# Altium PCB Final_MCU.PcbDoc (part 1 of 2)
Units mil, origin at the board's own origin, x right, y up, seen from the top; angles counter-clockwise.
Board outline 6000 x 4000 mil, 2 copper layers (Top Layer, Bottom Layer); 47 components, 30 nets, 197 pads, 0 vias.
Unrouted connection lines stored in the file: 115.
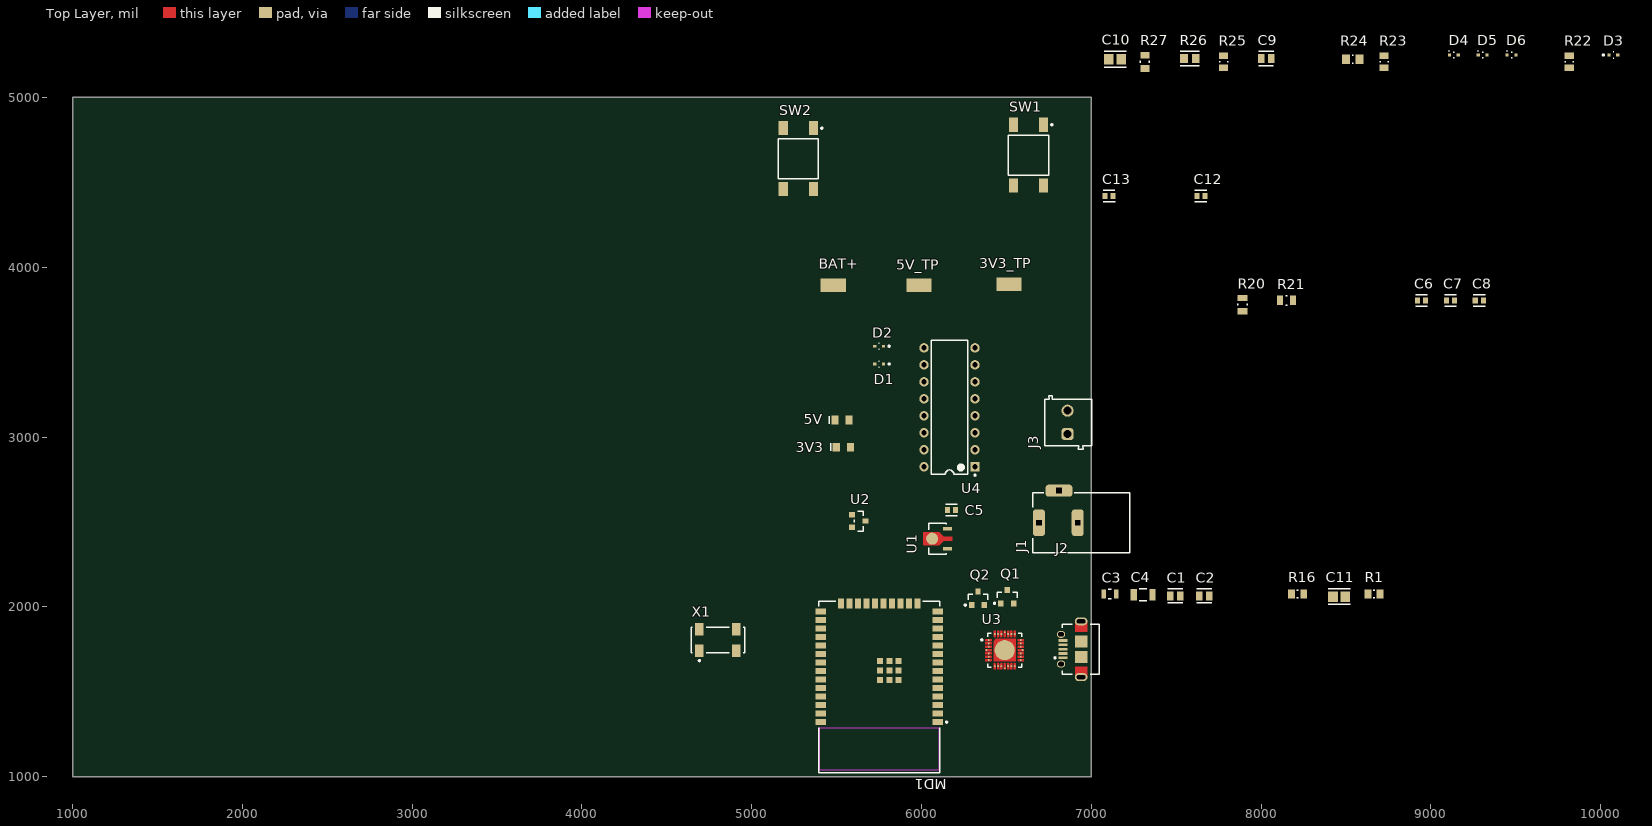
[diagram p0: Top Layer view]
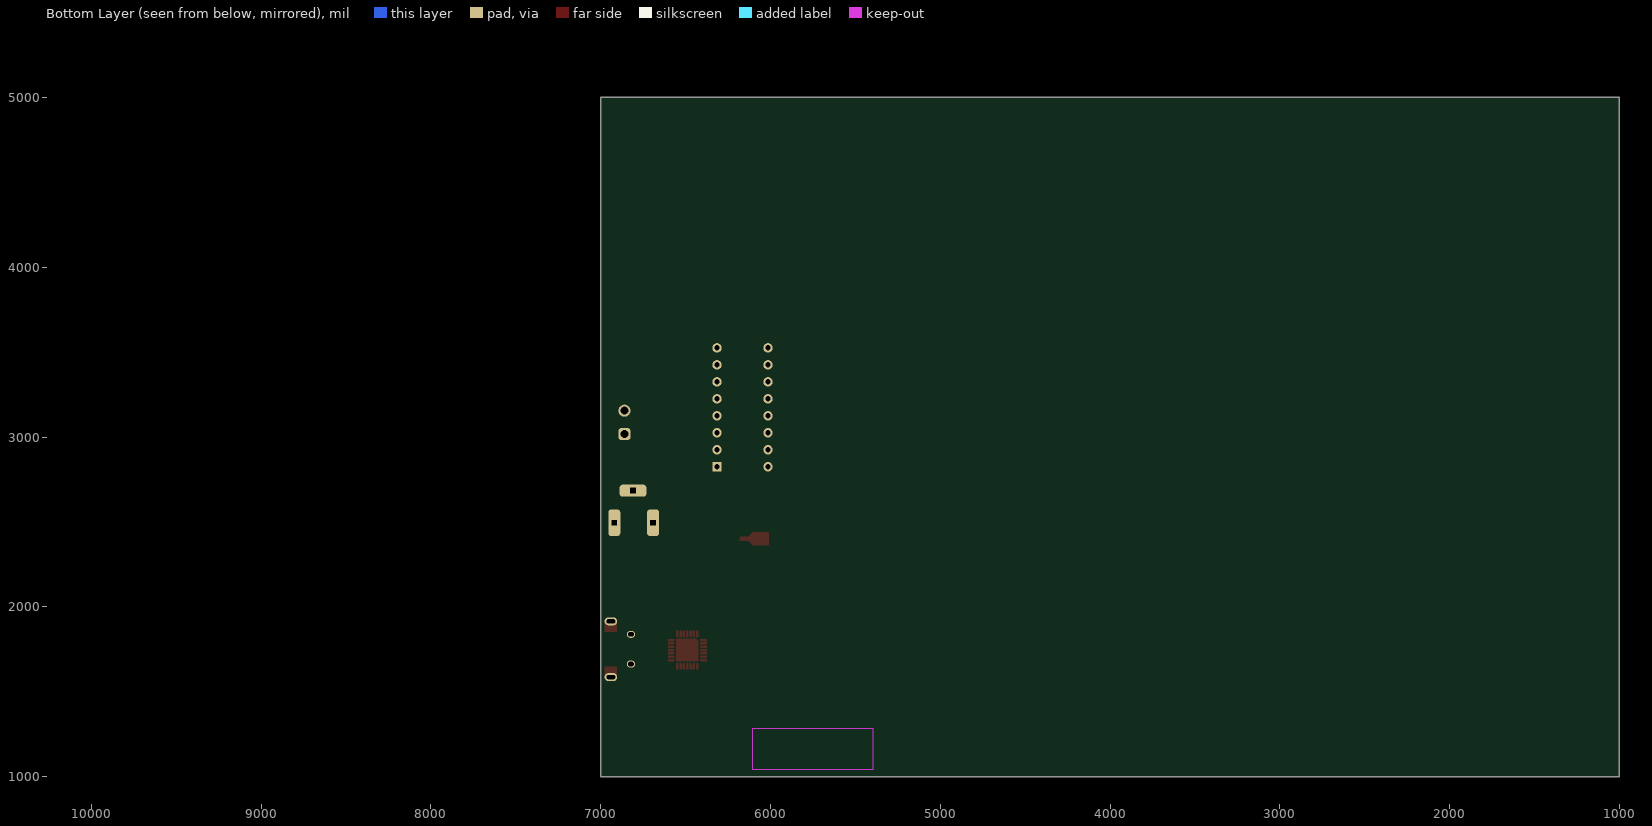
[diagram p1: Bottom Layer view, seen from below]

## Layer stack, top to bottom
Top Solder: solder mask 0.4, Solder Resist, Dk 3.5
Top Layer: signal copper 1.4
Dielectric 1: dielectric 12.6, FR-4, Dk 4.8
Bottom Layer: signal copper 1.4
Bottom Solder: solder mask 0.4, Solder Resist, Dk 3.5

## Board outline
1000,1000 7000,1000 7000,5000 1000,5000

## Design rules (kind name [scope] priority, off if disabled: settings)
Clearance [All] p1: gap=10 ignorepadtopadclearanceinfootprint=FALSE
PolygonConnect [All] p1: connectstyle=Relief reliefconductorwidth=10 reliefentries=4 polygonreliefangle="90 Angle" airgapwidth=10
RoutingVias [All] p1: holewidth=28 width=50 viastyle="Through Hole" minholewidth=28 minwidth=50 maxholewidth=28 maxwidth=50
SolderMaskExpansion [All] p1: expansion=4 istentingtop=FALSE
Width [All] p1: maxlimit=10 minlimit=10 preferedwidth=10
30 further rules are at their usual default settings.

## Classes and differential pairs
component class USB: C9 C10 D3 D4 D5 D6 J2 Q1 Q2 R22 R23 R24 R25 R26 R27 U3
component class Programming: C12 C13 SW1 SW2
component class Power: 3V3 3V3_TP 5V 5V_TP BAT+ C5 C6 C7 C8 D1 D2 J1 R20 R21 U1 U2
component class Motor: J3 U4
component class MCU: C1 C2 C3 C4 C11 MD1 R1 R16 X1

## Components (designator, comment, footprint, x,y, rotation, side; value= is the part's Value field where it differs from the comment)
3V3 "150080GS75000" WL-SMCW_0805_150080xx75000 5540,2940 r0 top
3V3_TP "" KSTN-5019_V 6515,3900 r180 top
5V "150080GS75000" WL-SMCW_0805_150080xx75000 5531.34,3100 r0 top
5V_TP "" KSTN-5019_V 5985,3895 r180 top
BAT+ "" KSTN-5019_V 5480,3895 r180 top
C1 "C0805C120J5GACTU" FP-C0805C-DN-MFG 7495,2065 r0 top value="12 pF"
C2 "C0805C120J5GACTU" FP-C0805C-DN-MFG 7665,2065 r0 top value="12 pF"
C3 "GRM21BR60J226ME39L" FP-GRM21B-0_15-MFG 7110,2075 r0 top value=22uF
C4 "C1206C104K1RACTU" FP-C1206C-EB-MFG 7305,2070 r0 top value="0.10 μF"
C5 "C0603C104K5RACTU" FP-C0603C-CF-MFG 6176.38,2570 r0 top value="0.10 μF"
C6 "C0603C104K5RACTU" FP-C0603C-CF-MFG 8945,3805 r0 top value="0.10 μF"
C7 "C0603C104K5RACTU" FP-C0603C-CF-MFG 9115,3805 r0 top value="0.10 μF"
C8 "C0603C104K5RACTU" FP-C0603C-CF-MFG 9285,3805 r0 top value="0.10 μF"
C9 "C0805C106K8PACTU" FP-C0805C-DG-MFG 8030,5230 r0 top value=10uF
C10 "CL21B105KOFNNNE" FP-CL21-IPC_A 7140,5225 r0 top value=1uF
C11 "CL21B105KOFNNNE" FP-CL21-IPC_A 8460,2060 r0 top value=1uF
C12 "C0603C104K5RACTU" FP-C0603C-CF-MFG 7645,4420 r0 top value="0.10 μF"
C13 "C0603C104K5RACTU" FP-C0603C-CF-MFG 7105,4420 r0 top value="0.10 μF"
D1 "RB520S30T1G" FP-502-01-MFG 5750,3430 r180 top
D2 "RB520S30T1G" FP-502-01-MFG 5750,3535 r180 top
D3 "RB520S30T1G" FP-502-01-MFG 10075,5250 r0 top
D4 "ESD5Z5.0T1G" ONSC-SOD-523-2-502-01_V 9135,5250 r0 top
D5 "ESD5Z5.0T1G" ONSC-SOD-523-2-502-01_V 9305,5250 r0 top
D6 "ESD5Z5.0T1G" ONSC-SOD-523-2-502-01_V 9475,5250 r0 top
J1 "694106301002" 694106301002 6941.65,2495 r90 top
J2 "47589-0001" MOLX-47589-0001_V 6880.94,1750.28 r90 top
J3 "691103110002" 691103110002 -43136.06,53086.1 r90 top
MD1 "ESP32-WROOM-32E (4MB)" FP-ESP32-WROOM-32E_4MB-MFG 5751.06,1528.03 r180 top
Q1 "BC818-40LT1G" ONSC-SOT-23-3-318-08_V 6505,2060 r90 top
Q2 "BC818-40LT1G" ONSC-SOT-23-3-318-08_V 6332.4,2049.37 r90 top
R1 "RC0805FR-0710KL" RESC2013X60X35NL10T20 8665,2075 r0 top value=10kR
R16 "RC0805FR-0710KL" RESC2013X60X35NL10T20 8215,2075 r0 top value=10kR
R20 "CRCW0805330RFKEA" FP-CRCW0805-e3-MFG 7890,3780 r90 top value=330R
R21 "CRCW0805330RFKEA" FP-CRCW0805-e3-MFG 8150,3805 r0 top value=330R
R22 "RC0805FR-0710KL" RESC2013X60X35NL10T20 9815,5210 r90 top value=10kR
R23 "RC0805FR-0710KL" RESC2013X60X35NL10T20 8725,5210 r90 top value=10kR
R24 "RC0805FR-071KL" RESC2013X60X35ML10T20 8540,5225 r0 top value=1kR
R25 "RC0805FR-0710KL" RESC2013X60X35NL10T20 7780,5210 r90 top value=10kR
R26 "RMCF0805FT22K1" FP-RMCF0805-IPC_B 7580,5230 r0 top value=22.1kR
R27 "RN73C2A47K5BTD" FP-RN732A-MFG 7315,5210 r90 top value=47.5KΩ
SW1 "FSM4JSMATR" TECO-FSM4JSMATR_V 6630,4660 r0 top
SW2 "FSM4JSMATR" TECO-FSM4JSMATR_V 5275,4640 r0 top
U1 "L78L05ACUTR" FP-SOT-89-7098166-MFG 6095,2405 r90 top
U2 "AP2120N-3.3TRG1" FP-SOT23-MFG 5630,2505 r0 top
U3 "CP2102N-A02-GQFN28R" FP-CP2102N-A02-GQFN28R-MFG 6490,1745 r0 top
U4 "L293D" STM-L293D-16 6165,3175 r180 top
X1 "ABS25-32.768KHZ-6-T" ABRA-ABS25-4_V 4800,1805 r0 top

## Footprints (in the part's own frame and the unit in brackets; to place one, negate y for a bottom-side part, rotate by r counter-clockwise, add the part's x,y. Pads: shape width x height; smd on the part's side, far side on the other; paste and mask are expansions set on the pad)
691103110002 [mm] "3,50mm - modular - blue - Horizontal wire entry - Pressure clamp - 8,4mm height - 02p"
  rrect50% 1.8x1.8 hole 1.2: 1(-1271.75,-1269.9)
  round 1.8 hole 1.2: 2(-1268.25,-1269.9)
  silkscreen extent -1274,-1273.5 -1266,-1266.5, body extent -1274,-1273.5 -1266,-1266.5, height 8.45
694106301002 [mm] "DC Power Jack Right Angled(6.4)"
  rrect50% 4x1.8 hole 0.8 square: 1(0,6.35) 2(0,0.55)
  rrect50% 1.8x4 hole 0.8 square: 3(4.8,3.35)
  silkscreen extent -4.5,-7.25 4.5,7.25, body extent -4.5,-7.25 5,7.25, height 10.75
ABRA-ABS25-4_V [mm] "SMD, 4-Leads, Body 8x3.8mm, Pitch 5.5mm, Height 2.5mm"
  rect 1.3x1.9 smd: 1(-2.75,-1.6) 2(2.75,-1.6) 3(2.75,1.6) 4(-2.75,1.6)
  silkscreen extent -4,-3.22 4,1.9, body extent -4,-2 4,2, height 2.66
FP-502-01-MFG [mm]
  rect 0.48x0.4 smd paste+0 mask+0: 1(-0.66,0) 2(0.66,0)
  silkscreen extent -1.63,-0.45 0.05,0.45, body extent -1,-0.55 1,0.55, height 0.25
FP-C0603C-CF-MFG [mm]
  rect 0.75x0.9 smd paste+0 mask+0: 1(-0.6,0) 2(0.6,0)
  silkscreen extent -0.87,-0.85 0.88,0.85, body extent -1.2,-0.6 1.2,0.6, height 0.25
FP-C0805C-DG-MFG [mm]
  rect 0.95x1.35 smd paste+0 mask+0: 1(-0.75,0) 2(0.75,0)
  silkscreen extent -1.11,-1.08 1.1,1.07, body extent -1.4,-0.85 1.4,0.85, height 0.25
FP-C0805C-DN-MFG [mm]
  rect 0.95x1.35 smd paste+0 mask+0: 1(-0.75,0) 2(0.75,0)
  silkscreen extent -1.1,-1.07 1.1,1.07, body extent -1.4,-0.85 1.4,0.85, height 0.25
FP-C1206C-EB-MFG [mm]
  rect 0.95x1.7 smd paste+0 mask+0: 1(-1.4,0) 2(1.4,0)
  silkscreen extent -0.55,-0.9 0.55,0.9, body extent -2,-1 2,1, height 0.25
FP-CL21-IPC_A [mil]
  rect 57.27x61.27 smd paste+0 mask+0: 1(-36.45,0) 2(36.45,0)
  silkscreen extent -65,-46 65,46, body extent -85,-50 85,50, height 10
FP-CP2102N-A02-GQFN28R-MFG [mm]
  round 0.27 smd paste+0 mask+0: 1(-2.4,1.5) 2(-2.4,1) 3(-2.4,0.5) 4(-2.725,0) 5(-2.4,-0.5) 6(-2.4,-1) 7(-2.4,-1.5) 8(-1.5,-2.4) 9(-1,-2.4) 10(-0.5,-2.4) 11(0,-2.725) 12(0.5,-2.4) 13(1,-2.4) 14(1.5,-2.4) 15(2.4,-1.5) 16(2.4,-1) 17(2.4,-0.5) 18(2.675,0) 19(2.4,0.5) 20(2.4,1) 21(2.4,1.5) 22(1.5,2.4) 23(1,2.4) 24(0.5,2.4) 25(0,2.675) 26(-0.5,2.4) 27(-1,2.4) 28(-1.5,2.4)
  round 3.015 smd paste-1000 mask+0: 29(0,0)
  Top Layer region: -1.35,2.875 -1.35,2.075 -1.361,2.018 -1.394,1.969 -1.443,1.936 -1.5,1.925 -1.5,1.925 -1.557,1.936 -1.606,1.969 -1.639,2.018 -1.65,2.075 -1.65,2.075 -1.65,2.875
  Top Layer region: -0.85,2.875 -0.85,2.075 -0.861,2.018 -0.894,1.969 -0.943,1.936 -1,1.925 -1,1.925 -1.057,1.936 -1.106,1.969 -1.139,2.018 -1.15,2.075 -1.15,2.075 -1.15,2.875
  Top Layer region: -0.35,2.875 -0.35,2.075 -0.361,2.018 -0.394,1.969 -0.443,1.936 -0.5,1.925 -0.5,1.925 -0.557,1.936 -0.606,1.969 -0.639,2.018 -0.65,2.075 -0.65,2.075 -0.65,2.875
  Top Layer region: 0.15,2.875 0.15,2.075 0.139,2.018 0.106,1.969 0.057,1.936 0,1.925 0,1.925 -0.057,1.936 -0.106,1.969 -0.139,2.018 -0.15,2.075 -0.15,2.075 -0.15,2.875
  Top Layer region: 0.65,2.875 0.65,2.075 0.639,2.018 0.606,1.969 0.557,1.936 0.5,1.925 0.5,1.925 0.443,1.936 0.394,1.969 0.361,2.018 0.35,2.075 0.35,2.075 0.35,2.875
  Top Layer region: 1.15,2.875 1.15,2.075 1.139,2.018 1.106,1.969 1.057,1.936 1,1.925 1,1.925 0.943,1.936 0.894,1.969 0.861,2.018 0.85,2.075 0.85,2.075 0.85,2.875
  Top Layer region: 1.65,2.875 1.65,2.075 1.639,2.018 1.606,1.969 1.557,1.936 1.5,1.925 1.5,1.925 1.443,1.936 1.394,1.969 1.361,2.018 1.35,2.075 1.35,2.075 1.35,2.875
  Top Layer region: 2.875,1.35 2.075,1.35 2.018,1.361 1.969,1.394 1.936,1.443 1.925,1.5 1.925,1.5 1.936,1.557 1.969,1.606 2.018,1.639 2.075,1.65 2.075,1.65 2.875,1.65
  Top Layer region: 2.875,0.85 2.075,0.85 2.018,0.861 1.969,0.894 1.936,0.943 1.925,1 1.925,1 1.936,1.057 1.969,1.106 2.018,1.139 2.075,1.15 2.075,1.15 2.875,1.15
  Top Layer region: 2.875,0.35 2.075,0.35 2.018,0.361 1.969,0.394 1.936,0.443 1.925,0.5 1.925,0.5 1.936,0.557 1.969,0.606 2.018,0.639 2.075,0.65 2.075,0.65 2.875,0.65
  Top Layer region: 2.875,-0.15 2.075,-0.15 2.018,-0.139 1.969,-0.106 1.936,-0.057 1.925,0 1.925,0 1.936,0.057 1.969,0.106 2.018,0.139 2.075,0.15 2.075,0.15 2.875,0.15
  Top Layer region: 2.875,-0.65 2.075,-0.65 2.018,-0.639 1.969,-0.606 1.936,-0.557 1.925,-0.5 1.925,-0.5 1.936,-0.443 1.969,-0.394 2.018,-0.361 2.075,-0.35 2.075,-0.35 2.875,-0.35
  Top Layer region: 2.875,-1.15 2.075,-1.15 2.018,-1.139 1.969,-1.106 1.936,-1.057 1.925,-1 1.925,-1 1.936,-0.943 1.969,-0.894 2.018,-0.861 2.075,-0.85 2.075,-0.85 2.875,-0.85
  Top Layer region: 2.875,-1.65 2.075,-1.65 2.018,-1.639 1.969,-1.606 1.936,-1.557 1.925,-1.5 1.925,-1.5 1.936,-1.443 1.969,-1.394 2.018,-1.361 2.075,-1.35 2.075,-1.35 2.875,-1.35
  Top Layer region: 1.35,-2.875 1.35,-2.075 1.361,-2.018 1.394,-1.969 1.443,-1.936 1.5,-1.925 1.5,-1.925 1.557,-1.936 1.606,-1.969 1.639,-2.018 1.65,-2.075 1.65,-2.075 1.65,-2.875
  Top Layer region: 0.85,-2.875 0.85,-2.075 0.861,-2.018 0.894,-1.969 0.943,-1.936 1,-1.925 1,-1.925 1.057,-1.936 1.106,-1.969 1.139,-2.018 1.15,-2.075 1.15,-2.075 1.15,-2.875
  Top Layer region: 0.35,-2.875 0.35,-2.075 0.361,-2.018 0.394,-1.969 0.443,-1.936 0.5,-1.925 0.5,-1.925 0.557,-1.936 0.606,-1.969 0.639,-2.018 0.65,-2.075 0.65,-2.075 0.65,-2.875
  Top Layer region: -0.15,-2.875 -0.15,-2.075 -0.139,-2.018 -0.106,-1.969 -0.057,-1.936 0,-1.925 0,-1.925 0.057,-1.936 0.106,-1.969 0.139,-2.018 0.15,-2.075 0.15,-2.075 0.15,-2.875
  Top Layer region: -0.65,-2.875 -0.65,-2.075 -0.639,-2.018 -0.606,-1.969 -0.557,-1.936 -0.5,-1.925 -0.5,-1.925 -0.443,-1.936 -0.394,-1.969 -0.361,-2.018 -0.35,-2.075 -0.35,-2.075 -0.35,-2.875
  Top Layer region: -1.15,-2.875 -1.15,-2.075 -1.139,-2.018 -1.106,-1.969 -1.057,-1.936 -1,-1.925 -1,-1.925 -0.943,-1.936 -0.894,-1.969 -0.861,-2.018 -0.85,-2.075 -0.85,-2.075 -0.85,-2.875
  Top Layer region: -1.65,-2.875 -1.65,-2.075 -1.639,-2.018 -1.606,-1.969 -1.557,-1.936 -1.5,-1.925 -1.5,-1.925 -1.443,-1.936 -1.394,-1.969 -1.361,-2.018 -1.35,-2.075 -1.35,-2.075 -1.35,-2.875
  Top Layer region: -2.875,-1.35 -2.075,-1.35 -2.018,-1.361 -1.969,-1.394 -1.936,-1.443 -1.925,-1.5 -1.925,-1.5 -1.936,-1.557 -1.969,-1.606 -2.018,-1.639 -2.075,-1.65 -2.075,-1.65 -2.875,-1.65
  Top Layer region: -2.875,-0.85 -2.075,-0.85 -2.018,-0.861 -1.969,-0.894 -1.936,-0.943 -1.925,-1 -1.925,-1 -1.936,-1.057 -1.969,-1.106 -2.018,-1.139 -2.075,-1.15 -2.075,-1.15 -2.875,-1.15
  Top Layer region: -2.875,-0.35 -2.075,-0.35 -2.018,-0.361 -1.969,-0.394 -1.936,-0.443 -1.925,-0.5 -1.925,-0.5 -1.936,-0.557 -1.969,-0.606 -2.018,-0.639 -2.075,-0.65 -2.075,-0.65 -2.875,-0.65
  Top Layer region: -2.875,0.15 -2.075,0.15 -2.018,0.139 -1.969,0.106 -1.936,0.057 -1.925,0 -1.925,0 -1.936,-0.057 -1.969,-0.106 -2.018,-0.139 -2.075,-0.15 -2.075,-0.15 -2.875,-0.15
  Top Layer region: -2.875,0.65 -2.075,0.65 -2.018,0.639 -1.969,0.606 -1.936,0.557 -1.925,0.5 -1.925,0.5 -1.936,0.443 -1.969,0.394 -2.018,0.361 -2.075,0.35 -2.075,0.35 -2.875,0.35
  Top Layer region: -2.875,1.15 -2.075,1.15 -2.018,1.139 -1.969,1.106 -1.936,1.057 -1.925,1 -1.925,1 -1.936,0.943 -1.969,0.894 -2.018,0.861 -2.075,0.85 -2.075,0.85 -2.875,0.85
  Top Layer region: -2.875,1.65 -2.075,1.65 -2.018,1.639 -1.969,1.606 -1.936,1.557 -1.925,1.5 -1.925,1.5 -1.936,1.443 -1.969,1.394 -2.018,1.361 -2.075,1.35 -2.075,1.35 -2.875,1.35
  Top Layer region: -1.325,1.675 1.675,1.675 1.675,-1.675 -1.675,-1.675 -1.675,1.325 -1.325,1.675
  silkscreen extent -3.55,-2.55 2.55,2.55, body extent -2.98,-2.98 2.98,2.98, height 0.25
FP-CRCW0805-e3-MFG [mm]
  rect 0.95x1.45 smd paste+0 mask+0: 1(-0.975,0) 2(0.975,0)
  silkscreen extent -0.13,-0.7 0.13,0.7, body extent -1.55,-0.82 1.55,0.82, height 0.25
FP-ESP32-WROOM-32E_4MB-MFG [mm]
  rect 1.5x0.9 smd paste+0 mask+0: 1(-8.75,5.26) 2(-8.75,3.99) 3(-8.75,2.72) 4(-8.75,1.45) 5(-8.75,0.18) 6(-8.75,-1.09) 7(-8.75,-2.36) 8(-8.75,-3.63) 9(-8.75,-4.9) 10(-8.75,-6.17) 11(-8.75,-7.44) 12(-8.75,-8.71) 13(-8.75,-9.98) 14(-8.75,-11.25) 25(8.75,-11.25) 26(8.75,-9.98) 27(8.75,-8.71) 28(8.75,-7.44) 29(8.75,-6.17) 30(8.75,-4.9) 31(8.75,-3.63) 32(8.75,-2.36) 33(8.75,-1.09) 34(8.75,0.18) 35(8.75,1.45) 36(8.75,2.72) 37(8.75,3.99) 38(8.75,5.26)
  rect 0.9x1.5 smd paste+0 mask+0: 15(-5.71,-12.5) 16(-4.44,-12.5) 17(-3.17,-12.5) 18(-1.9,-12.5) 19(-0.63,-12.5) 20(0.64,-12.5) 21(1.91,-12.5) 22(3.18,-12.5) 23(4.45,-12.5) 24(5.72,-12.5)
  rect 0.9x0.9 smd paste+0 mask+0: 39(-2.9,-1.06) 39(-2.9,-3.86) 39(-2.9,-2.46) 39(-1.5,-1.06) 39(-1.5,-2.46) 39(-1.5,-3.86) 39(-0.1,-1.06) 39(-0.1,-2.46) 39(-0.1,-3.86)
  Keep-Out Layer region: -9,6.205 9,6.205 9,12.395 -9,12.395
  Keep-Out Layer region: -9,6.205 9,6.205 9,12.395 -9,12.395
  silkscreen extent -10.2,-12.83 9.08,12.83, body extent -9.6,-13.35 9.6,12.93, height 0.25
FP-GRM21B-0_15-MFG [mm]
  rect 0.7x1.3 smd paste+0 mask+0: 1(-0.95,0) 2(0.95,0)
  silkscreen extent -0.23,-0.7 0.23,0.7, body extent -1.4,-0.8 1.4,0.8, height 0.25
FP-RMCF0805-IPC_B [mil]
  rect 45.46x53.63 smd paste+0 mask+0: 1(-34.48,0) 2(34.48,0)
  silkscreen extent -57,-43 57,43, body extent -67,-37 67,37, height 10
FP-RN732A-MFG [mm]
  rect 1x1.35 smd paste+0 mask+0: 1(-1,0) 2(1,0)
  silkscreen extent -0.13,-0.7 0.13,0.7, body extent -1.6,-0.8 1.6,0.8, height 0.25
FP-SOT23-MFG [mm]
  rect 0.9x0.8 smd paste+0 mask+0: 1(-1,0.95) 2(-1,-0.95) 3(1,0)
  silkscreen extent -0.7,-1.5 0.7,1.5, body extent -1.55,-1.6 1.55,1.6, height 0.25
FP-SOT-89-7098166-MFG [mm]
  rect 0.57x1.4 smd paste+0 mask+0: 1(-1.6,-1.475) 3(1.4,-1.475)
  round 1.8 smd paste+0 mask+0: 2(-0.1,0.825)
  Top Layer region: -1.1,1.975 -1.1,-0.275 -0.425,-0.95 -0.425,-2.175 0.225,-2.175 0.225,-0.95 0.9,-0.275 0.9,1.975 0.873,2.075 0.8,2.148 0.7,2.175 0.7,2.175 -0.9,2.175 -1,2.148 -1.073,2.075 -1.1,1.975
  silkscreen extent -2.4,-1.3 2.2,1.3, body extent -2.5,-2.28 2.3,2.28, height 0.25
KSTN-5019_V [mm] "Test Point, 1-Leads, Body 3.81x2.03mm"
  rect 3.8x2.03 smd: 1(0,0)
  body extent -1.9,-1.01 1.9,1.02, height 2.29
MOLX-47589-0001_V [mm] "SMD, 5-Leads, Body 7.5x5.6mm, Pitch 0.65mm"
  rect 0.4x1.35 smd: 1(-1.3,1.175) 2(-0.65,1.175) 3(0,1.175) 4(0.65,1.175) 5(1.3,1.175)
  oval 1.05x1.25 hole 0.65 slot 0.85 at 90 deg: 6(-2.225,1.5) 7(2.225,1.5)
  oval 1.2x1.9 hole 0.6 slot 1.3 at 90 deg: 8(-4.175,-1.5) 11(4.175,-1.5)
  rect 1.8x1.9 smd: 9(-1.15,-1.5) 10(1.15,-1.5)
  Top Layer region: 2.6,-2.45 4.175,-2.45 4.175,-0.55 2.6,-0.55
  Top Layer region: -2.6,-0.55 -4.175,-0.55 -4.175,-2.45 -2.6,-2.45
  silkscreen extent -3.75,-4.25 3.75,2.52, body extent -4.32,-4.25 4.32,1.64, height 2.74
ONSC-SOD-523-2-502-01_V [mm] "SOD, 2-Leads, Body 1.2x0.8mm"
  rect 0.48x0.4 smd: 1(-0.66,0) 2(0.66,0)
  silkscreen extent -0.75,-0.4 0.07,0.65, body extent -0.6,-0.4 0.6,0.4, height 0.7
ONSC-SOT-23-3-318-08_V [mm] "SOT23, 3-Leads, Body 2.92x1.3mm, Pitch 0.95mm"
  rect 0.9x0.8 smd: 1(-1,0.95) 2(-1,-0.95) 3(1,0)
  silkscreen extent -1.12,-1.46 0.65,2.02, body extent -0.65,-1.46 0.65,1.46, height 1.11
RESC2013X60X35ML10T20 [mm] "Chip Resistor, 2-Leads, Body 2.1x1.35mm, IPC Low Density"
  rect 1.2x1.45 smd: 1(-1,0) 2(1,0)
  silkscreen extent -0.1,-0.63 0.1,0.63, body extent -1.05,-0.68 1.05,0.67, height 0.6
RESC2013X60X35NL10T20 [mm] "Chip Resistor, 2-Leads, Body 2.1x1.35mm, IPC Medium Density"
  rect 1x1.35 smd: 1(-0.9,0) 2(0.9,0)
  silkscreen extent -0.1,-0.58 0.1,0.58, body extent -1.05,-0.68 1.05,0.67, height 0.6
STM-L293D-16 [mm] "DIP, 16-Leads, Body 20x6.85mm, Pitch 2.54mm"
  rect 1.4x1.4 hole 0.8: 1(-3.81,8.89)
  round 1.4 hole 0.8: 2(-3.81,6.35) 3(-3.81,3.81) 4(-3.81,1.27) 5(-3.81,-1.27) 6(-3.81,-3.81) 7(-3.81,-6.35) 8(-3.81,-8.89) 9(3.81,-8.89) 10(3.81,-6.35) 11(3.81,-3.81) 12(3.81,-1.27) 13(3.81,1.27) 14(3.81,3.81) 15(3.81,6.35) 16(3.81,8.89)
  silkscreen extent -3.94,-10 2.7,10.26, body extent -3.93,-10 3.93,10, height 5.1
TECO-FSM4JSMATR_V [mm] "SMD, 4-Leads, Body 6x6mm, Pitch 4.5mm"
  rect 1.4x2.1 smd: 1(2.25,4.55) 2(2.25,-4.55) 3(-2.25,4.55) 4(-2.25,-4.55)
  silkscreen extent -3,-3 3.63,4.67, body extent -3,-5 3,5, height 5.08
WL-SMCW_0805_150080xx75000 [mm] "SMD Mono-color Chip LED, body 2.0x1.25mm"
  rect 1.1x1.3 smd: 1(-1.05,0) 2(1.05,0)
  silkscreen extent -2,-0.6 -1.8,0.6, body extent -1,-0.63 1,0.62, height 0.7

## Part data
3V3 5V: library part CMP-1426-00007-2, Case Code (Imperial)=0805, Case Code (Metric)=2012, Color=Green, Forward Current=100mA, Forward Voltage=3.2V, Manufacturer="Wurth Electronics", Max Junction Temperature (Tj)=95°C, Max Operating Temperature=85°C, Max Reverse Voltage (DC)=5V, Min Operating Temperature=-40°C, Power Dissipation=105mW, Supplier Part Number=732-4983-1-ND, Test Current=20mA, Case/Package=0805, Category=LEDs, Channels=1, ComponentLink1Description=https://datasheet.ciiva.com:443/pdfs/VipMasterIC/IC/MIDC/MIDC-S-A0007455966/MIDC-S-A0007455966-1.pdf?src-supplier=IHS+Markit, ComponentLink1URL=https://datasheet.ciiva.com:443/pdfs/VipMasterIC/IC/MIDC/MIDC-S-A0007455966/MIDC-S-A0007455966-1.pdf?src-supplier=IHS+Markit, ComponentLink2Description=https://datasheet.ciiva.com/29563/150080gs75000-29563008.pdf?src-supplier=Digikey, ComponentLink2URL=https://datasheet.ciiva.com/29563/150080gs75000-29563008.pdf?src-supplier=Digikey, ComponentLink3Description=https://datasheet.ciiva.com/29279/759434-da-01-en-chipled-0805-w-kl-gruen-150080gs75000-29279039.pdf?src-supplier=Conrad, ComponentLink3URL=https://datasheet.ciiva.com/29279/759434-da-01-en-chipled-0805-w-kl-gruen-150080gs75000-29279039.pdf?src-supplier=Conrad, Dominant Wavelength=525nm, Height=700µm, Length=2mm, Lens Style="Clear, Rectangular", Luminous Intensity=450mcd, Luminous Intensity-Nom=450mcd, Manufacturer Part Number=150080GS75000, Mount="Surface Mount", Mounting Technology="Surface Mount", NexarPartId=29717780, Optoelectronic Device Type="SINGLE COLOR LED", Overall Height=0.7mm, Packaging="Tape and Reel", Peak Wavelength=515nm, Pins=2, Pricing="1=0.19, 50=0.176, 100=0.151, 500=0.131 (USD)", REACH SVHC=Unknown, Reach SVHC Compliant=Yes, Reverse Voltage=5V, RoHS=Compliant, RoHS Compliant=Yes, Shape=Rectangular, Size=1.4mm, Stock=74088, Supplier=Digikey, Terminal Pitch=2.1mm, Viewing Angle=140°, Wavelength=520nm, Width=1.25mm
3V3_TP 5V_TP BAT+: library part CMP-1672-00008-1, "Test Point, 1 Position SMD, RoHS, Tape and Reel", Manufacturer="Keystone Electronics", Manufacturer Part Number=5019, Package Quantity=1000, Supplier Part Number=36-5019CT-ND, Category=Connectors, ComponentLink1Description="Manufacturer URL", ComponentLink1URL=http://www.keyelco.com/, ComponentLink2Description=Datasheet, ComponentLink2URL=http://www.keyelco.com/product-pdf.cfm?p=1357, ComponentLink3Description=https://datasheet.ciiva.com:443/pdfs/VipMasterIC/IC/KEYC/KEYC-S-A0003063693/KEYC-S-A0003063693-1.pdf?src-supplier=IHS+Markit, ComponentLink3URL=https://datasheet.ciiva.com:443/pdfs/VipMasterIC/IC/KEYC/KEYC-S-A0003063693/KEYC-S-A0003063693-1.pdf?src-supplier=IHS+Markit, ComponentLink4Description=https://datasheet.ciiva.com/16318/m60-2p61-16318395.pdf?src-supplier=Future+Electronics, ComponentLink4URL=https://datasheet.ciiva.com/16318/m60-2p61-16318395.pdf?src-supplier=Future+Electronics, ComponentLink5Description=https://datasheet.ciiva.com/14848/m60-2p61-14848438.pdf?src-supplier=Digikey, ComponentLink5URL=https://datasheet.ciiva.com/14848/m60-2p61-14848438.pdf?src-supplier=Digikey, ComponentLink6Description=https://datasheet.ciiva.com/14848/m60-2p61-14848439.pdf?src-supplier=Digikey, ComponentLink6URL=https://datasheet.ciiva.com/14848/m60-2p61-14848439.pdf?src-supplier=Digikey, ComponentLink7Description=https://datasheet.ciiva.com/14848/m60-2p61-14848437.pdf?src-supplier=Digikey, ComponentLink7URL=https://datasheet.ciiva.com/14848/m60-2p61-14848437.pdf?src-supplier=Digikey, ComponentLink8Description=https://datasheet.ciiva.com/16885/70182998-16885945.pdf?src-supplier=Allied+Electronics, ComponentLink8URL=https://datasheet.ciiva.com/16885/70182998-16885945.pdf?src-supplier=Allied+Electronics, Connector Type="Interconnection Device", Contact Plating=Silver, DatasheetVersion=03/2014, Mount="Surface Mount", Mounting Technology="Surface Mount", PackageDescription="1-Pin Surface Mount Device, Body 3.81 x 2.03 mm", PackageReference=5019, Packaging="Tape and Reel", Pins=1, Pricing="1=0.34, 25=0.2736, 100=0.2234, 250=0.20064, 500=0.19152 (USD)", Reach SVHC Compliant=Yes, RoHS=Yes, RoHS Compliant=Yes, RoHSCompliant=True, Stock=174520, Supplier=Digikey
C1 C2: library part CMP-2007-00441-2, "CAP CER 12PF 50V C0G/NP0 0805", Capacitance="12 pF", Capacitor Type=Ceramic, Case/Package=0805, Manufacturer=KEMET, Max Operating Temperature=125°C, Min Operating Temperature=-55°C, Package=C0805C-DN, Package Shape=Rectangular, Rated DC Voltage (URdc)=50V, Supplier Part Number=399-C0805C120J5GAC7800CT-ND, Temperature="-55°C to +125°C", Temperature Characteristic=C0G, Temperature Coefficient=30ppm/°C, Temperature Range High=+125°C, Tolerance=0.05, Tolerance  (fill in as +-)=5%, Voltage Rating="50 V", Automotive=No, Category=Cap, ComponentLink1Description=https://datasheet.ciiva.com:443/pdfs/VipMasterIC/IC/KEME/KEME-S-A0007600110/KEME-S-A0007597378-1.pdf?src-supplier=IHS+Markit, ComponentLink1URL=https://datasheet.ciiva.com:443/pdfs/VipMasterIC/IC/KEME/KEME-S-A0007600110/KEME-S-A0007597378-1.pdf?src-supplier=IHS+Markit, ComponentLink2Description=Datasheet, ComponentLink2URL=https://content.kemet.com/datasheets/KEM_C1003_C0G_SMD.pdf, Device Class L1="Passive Components", Device Class L2=Capacitors, Device Class L3="Ceramic Capacitors", Dielectric Material=Ceramic, Digikey Description="CAP CER 12PF 50V C0G/NP0 0805", Height=0.88mm, Ipc Land Pattern Name=CAPC200125X78, JESD-609 Code=e3, Lead Free=Yes, Manufacturer Part Number=C0805C120J5GACTU, Material=Ceramic, Mounting Technology="Surface Mount", Mouser Description="Multilayer Ceramic Capacitors MLCC - SMD/SMT 50volts 12pF C0G 5%", Multilayer=Yes, Octopart=https://octopart.com/c0805c120j5gactu-kemet-126518, Packaging="Tape and Reel", Pins=2, Pricing="1=0.12, 10=0.081, 50=0.0482, 100=0.038, 500=0.02804, 1000=0.02321 (USD)", Reach SVHC Compliant=Yes, RoHS=TRUE, RoHS Compliant=Yes, Stock=105044, Supplier=Digikey, Temperature Characteristics Code=C0G, Temperature Range Low=-55°C, Terminal Finish=Nickel, Termination=Wraparound, Tolerance (fill in as +-)=5%
C3: library part CMP-2007-03385-2, "Chip Multilayer Ceramic Capacitors for General Purpose, 0805, 22uF, X5R, 15%, 20%, 6.3V", Capacitance=22uF, Capacitor Type=Ceramic, Case Code (Imperial)=0805, Case Code (Metric)=2012, Dielectric=X5R, Manufacturer=Murata, Max Operating Temperature=85°C, Min Operating Temperature=-55°C, Package Quantity=1, Package Shape=Rectangular, Package Style=SMTMeter, Rated DC Voltage (URdc)=6.3V, Supplier Part Number=490-1719-1-ND, Tolerance=20%, Case/Package=0805, Category="Ceramic Capacitors", ComponentLink1Description=https://psearch.en.murata.com:443/capacitor/product/GRM21BR60J226ME39%23.pdf?src-supplier=IHS+Markit, ComponentLink1URL=https://psearch.en.murata.com:443/capacitor/product/GRM21BR60J226ME39%23.pdf?src-supplier=IHS+Markit, Depth=1.25mm, Dielectric Material=Ceramic, Height=1.25mm, JESD-609 Code=e3, Lead Free="Lead Free", Length=2mm, Manufacturer Part Number=GRM21BR60J226ME39L, Material=Ceramic, Mount="Surface Mount", Mounting Technology="Surface Mount", Multilayer=Yes, Packaging="Tape and Reel", Pins=2, Pricing="1=0.3, 10=0.196, 50=0.1444, 100=0.1177, 500=0.09288, 1000=0.07844 (USD)", Radiation Hardening=No, REACH SVHC="No SVHC", Reach SVHC Compliant=Yes, RoHS=Yes, RoHS Compliant=Yes, Stock=3670406, Supplier=Digikey, Temperature Characteristics Code=X5R, Terminal Finish=Nickel, Termination=SMD/SMT, Thickness=0.053inch, Tolerance  (fill in as +-)=20%, Tolerance (fill in as +-)=20%, Voltage=6.3V, Voltage Rating=6.3V, Voltage Rating (DC)=6.3V, Width=0.049inch
C4: library part CMP-03020-000153-1, "CAP CER 0.1UF 100V X7R 1206", Capacitance="0.10 μF", Capacitor Type=Ceramic, Case/Package=1206, Manufacturer=KEMET, Max Operating Temperature=125°C, Min Operating Temperature=-55°C, Package=C1206C-EB, Package Shape=Rectangular, Package Style=SMTMeter, Rated DC Voltage (URdc)=100V, Supplier Part Number=399-C1206C104K1RAC7800CT-ND, Temperature="-55°C to +150°C", Temperature Characteristic=X7R, Temperature Coefficient=15%, Temperature Range High=+150°C, Tolerance=0.1, Tolerance  (fill in as +-)=10%, Voltage Rating="100 V", Automotive=Yes, Automotive Grade="Grade 0", Category=Cap, ComponentLink1Description=https://datasheet.ciiva.com:443/pdfs/VipMasterIC/IC/KEME/KEME-S-A0008991654/KEME-S-A0008991654-1.pdf?src-supplier=IHS+Markit, ComponentLink1URL=https://datasheet.ciiva.com:443/pdfs/VipMasterIC/IC/KEME/KEME-S-A0008991654/KEME-S-A0008991654-1.pdf?src-supplier=IHS+Markit, ComponentLink2Description=Datasheet, ComponentLink2URL=https://content.kemet.com/datasheets/KEM_C1007_X8R_ULTRA_150C_SMD.pdf, Device Class L1="Passive Components", Device Class L2=Capacitors, Device Class L3="Ceramic Capacitors", Dielectric Material=Ceramic, Digikey Description="CAP CER 0.1UF 100V X7R 1206", Height=0.88mm, Ipc Land Pattern Name=CAPC320160X78, JESD-609 Code=e3, Lead Free=Yes, Length=3.2mm, Manufacturer Part Number=C1206C104K1RACTU, Material=Ceramic, Mounting Technology="Surface Mount", Mouser Description="CAP CER 0.1UF 100V X7R 1206", Multilayer=Yes, Octopart=https://octopart.com/c1206c104k1ractu-kemet-89521, Packaging="Tape and Reel", Pins=2, Pricing="1=0.22, 10=0.144, 50=0.101, 100=0.0816, 500=0.0606, 1000=0.05302 (USD)", Reach SVHC Compliant=Yes, RoHS=TRUE, RoHS Compliant=Yes, Stock=96437, Supplier=Digikey, Temperature Characteristics Code=X7R, Temperature Range Low=-55°C, Terminal Finish=Nickel, Termination=Wraparound, Tolerance (fill in as +-)=10%, Width=1.6mm
C5 C6 C7 C8 C12 C13: library part CMP-2006-03061-2, "CAP CER 0.1UF 50V X7R 0603", Capacitance="0.10 μF", Capacitor Type=Ceramic, Case/Package=0603, Manufacturer=KEMET, Max Operating Temperature=125°C, Min Operating Temperature=-55°C, Package=C0603C-CF, Package Shape=Rectangular, Package Style=SMTMeter, Rated DC Voltage (URdc)=50V, Supplier Part Number=399-C0603C104K5RAC7867CT-ND, Temperature="-55°C to +125°C", Temperature Characteristic=X7R, Temperature Coefficient=30ppm/°C, Temperature Range High=+125°C, Tolerance=0.1, Tolerance  (fill in as +-)=10%, Voltage Rating="50 V", Automotive=Yes, Automotive Grade="Grade 1", Category=Cap, ComponentLink1Description=https://datasheet.ciiva.com:443/pdfs/VipMasterIC/IC/KEME/KEME-S-A0008991654/KEME-S-A0008991654-1.pdf?src-supplier=IHS+Markit, ComponentLink1URL=https://datasheet.ciiva.com:443/pdfs/VipMasterIC/IC/KEME/KEME-S-A0008991654/KEME-S-A0008991654-1.pdf?src-supplier=IHS+Markit, ComponentLink2Description=Datasheet, ComponentLink2URL=https://api.kemet.com/component-edge/download/datasheet/C0603C100J5GACAUTO.pdf, Device Class L1="Passive Components", Device Class L2=Capacitors, Device Class L3="Ceramic Capacitors", Dielectric Material=Ceramic, Digikey Description="CAP CER 0.1UF 50V X7R 0603", Height=0.87mm, JESD-609 Code=e3, Lead Free=Yes, Length=1.6mm, Manufacturer Part Number=C0603C104K5RACTU, Material=Ceramic, Mounting Technology="Surface Mount", Multilayer=Yes, Octopart=https://octopart.com/c0603c104k5ractu-kemet-139244, Packaging="Tape and Reel", Pins=2, Pricing="1=0.11, 10=0.074, 50=0.0424, 100=0.0329, 500=0.02474, 1000=0.01944 (USD)", Reach SVHC Compliant=Yes, RoHS=TRUE, RoHS Compliant=Yes, Stock=4063890, Supplier=Digikey, Temperature Characteristics Code=X7R, Temperature Range Low=-55°C, Terminal Finish=Nickel, Termination=Wraparound, Tolerance (fill in as +-)=10%, Width=0.8mm
C9: library part CMP-2007-03243-2, "CAP CER 10UF 10V X5R 0805", 3DS Part Number=220-00001, Capacitance=10uF, Capacitor Type=Ceramic, Case/Package=0805, Manufacturer=Kemet, Max Operating Temperature=85°C, Min Operating Temperature=-55°C, Package=C0805C-DG, Package Shape=Rectangular, Package Style=SMTMeter, Rated DC Voltage (URdc)=10V, Supplier Part Number=399-C0805C106K8PAC7800DKR-ND, Temperature="-55°C to +85°C", Temperature Characteristic=X5R, Temperature Coefficient=15%, Temperature Range High=+85°C, Tolerance=10%, Automotive=No, Category=Cap, ComponentLink1Description=https://datasheet.ciiva.com:443/pdfs/VipMasterIC/IC/KEME/KEME-S-A0008991665/KEME-S-A0008991665-1.pdf?src-supplier=IHS+Markit, ComponentLink1URL=https://datasheet.ciiva.com:443/pdfs/VipMasterIC/IC/KEME/KEME-S-A0008991665/KEME-S-A0008991665-1.pdf?src-supplier=IHS+Markit, ComponentLink2Description=Datasheet, ComponentLink2URL=https://content.kemet.com/datasheets/KEM_C1006_X5R_SMD.pdf, Device Class L1="Passive Components", Device Class L2=Capacitors, Device Class L3="Ceramic Capacitors", Dielectric Material=Ceramic, Digikey Description="CAP CER 10UF 10V X5R 0805", Height=1.4mm, Ipc Land Pattern Name=CAPC200125X125, JESD-609 Code=e3, Lead Free=Yes, Length=2mm, Manufacturer Part Number=C0805C106K8PACTU, Material=Ceramic, Mounting Technology="Surface Mount", Mouser Description="CAP CER 10UF 10V X5R 0805", Multilayer=Yes, Octopart=https://octopart.com/c0805c106k8pactu-kemet-98697, Packaging="Tape and Reel", Pins=2, Pricing="1=0.14, 10=0.098, 50=0.0584, 100=0.0459, 500=0.03388, 1000=0.02805 (USD)", Reach SVHC Compliant=Yes, RoHS=TRUE, RoHS Compliant=Yes, Stock=5628606, Supplier=Digikey, Temperature Characteristics Code=X5R, Temperature Range Low=-55°C, Terminal Finish=Nickel, Termination=Wraparound, Tolerance  (fill in as +-)=10%, Tolerance (fill in as +-)=10%, Voltage=10V, Voltage Rating=10V, Width=1.25mm
C10 C11: library part CMP-13271-003098-1, "CL21 Series 0805 1uF 16V ±10% Tolerance X7R Multilayer Ceramic Chip Capacitor", Capacitance=1uF, Capacitor Type=Ceramic, Case Code (Imperial)=0805, Case Code (Metric)=2012, Dielectric=X7R, Manufacturer=Samsung, Max Operating Temperature=125°C, Min Operating Temperature=-55°C, Package Quantity=1, Package Shape=Rectangular, Package Style=SMTMeter, Rated DC Voltage (URdc)=16V, Supplier Part Number=1276-1026-1-ND, Tolerance=10%, Case/Package=0805, Category="Ceramic Capacitors", ComponentLink1Description=https://datasheet.ciiva.com:443/pdfs/VipMasterIC/IC/SEMS/SEMS-S-A0008523115/SEMS-S-A0008523189-1.pdf?src-supplier=IHS+Markit, ComponentLink1URL=https://datasheet.ciiva.com:443/pdfs/VipMasterIC/IC/SEMS/SEMS-S-A0008523115/SEMS-S-A0008523189-1.pdf?src-supplier=IHS+Markit, ComponentLink2Description=https://datasheet.ciiva.com/25800/cl21b105kofnnne-25800257.pdf?src-supplier=Digikey, ComponentLink2URL=https://datasheet.ciiva.com/25800/cl21b105kofnnne-25800257.pdf?src-supplier=Digikey, ComponentLink3Description=https://datasheet.ciiva.com/26838/getdatasheetpartid-358361-26838673.pdf?src-supplier=Verical, ComponentLink3URL=https://datasheet.ciiva.com/26838/getdatasheetpartid-358361-26838673.pdf?src-supplier=Verical, ComponentLink4Description=https://datasheet.ciiva.com/26310/mlcc-catalogdownload2013-eng-26310166.pdf?src-supplier=Distrelec, ComponentLink4URL=https://datasheet.ciiva.com/26310/mlcc-catalogdownload2013-eng-26310166.pdf?src-supplier=Distrelec, Contact Plating=Tin, Depth=1.25mm, Dielectric Material=Ceramic, Height=1.25mm, JESD-609 Code=e3, Lead Free="Lead Free", Length=2mm, Manufacturer Part Number=CL21B105KOFNNNE, Mount="Surface Mount", Mounting Technology="Surface Mount", Multilayer=Yes, Packaging="Tape and Reel", Pins=2, Pricing="1=0.1, 10=0.049, 50=0.028, 100=0.0217, 500=0.01636, 1000=0.01286 (USD)", Radiation Hardening=No, Reach SVHC Compliant=Yes, RoHS=Yes, RoHS Compliant=Yes, Stock=390405, Supplier=Digikey, Temperature Characteristics Code=X7R, Terminal Finish=Nickel, Termination=Wraparound, Thickness=0.053inch, Tolerance  (fill in as +-)=10%, Tolerance (fill in as +-)=10%, Voltage=16V, Voltage Rating=16V, Voltage Rating (DC)=16V, Width=0.049inch
D1 D2 D3: library part CMP-1055-00482-2, "DIODE SCHOTTKY 30V 200MA SOD523", Average Rectified Current=200mA, Case/Package=SOD-523-2, Forward Voltage=600mV, Max Operating Temperature=150°C, Max Repetitive Reverse Voltage (Vrrm)=30V, Max Reverse Leakage Current=1uA, Min Operating Temperature=-55°C, Package Quantity=1, Power Dissipation=200mW, Contact Plating=Tin, Current Rating=200mA, Element Configuration=Single, Forward Current=200mA, Height=0.7mm, Lead Free="Lead Free", Length=1.3mm, Max Forward Surge Current (Ifsm)=200mA, Max Reverse Voltage (DC)=30V, Number of Pins=2, Output Current=200mA, Packaging="Tape and Reel", Peak Reverse Current=1uA, Polarity=Standard, Radiation Hardening=No, REACH SVHC="No SVHC", Voltage Rating (DC)=30V, Width=0.9mm
D4 D5 D6: library part CMP-1063-00102-1, "Transient Voltage Suppressor, Micro-Packaged Diode for ESD Protection, 2-Pin SOD-523, Pb-Free, Tape and Reel", Clamping Voltage-Max=11.6V, Manufacturer="On Semiconductor", Max Operating Temperature=150°C, Max Power Dissipation=200mW, Min Breakdown Voltage=6.2V, Min Operating Temperature=-55°C, Non-rep Peak Rev Power Dis-Max=174W, Package Body Material=Plastic, Package Shape=Rectangular, Package Style="SMALL OUTLINEMeter", Rep Pk Reverse Voltage-Max=5V, Supplier Part Number=ESD5Z5.0T1GOSCT-ND, Additional Feature="UL RECOGNIZED", Category="ESD and Circuit Protection ICs", ComponentLink1Description="Manufacturer URL", ComponentLink1URL=http://www.onsemi.com/, ComponentLink2Description=Datasheet, ComponentLink2URL=http://www.onsemi.cn/pub_link/Collateral/ESD5Z2.5T1-D.PDF, ComponentLink3Description="Package Specification", ComponentLink3URL=http://www.onsemi.com/pub_link/Collateral/502-01.PDF, ComponentLink4Description=https://datasheet.ciiva.com:443/pdfs/VipMasterIC/IC/ONSM/ONSM-S-A0006325923/ONSM-S-A0006325923-1.pdf?src-supplier=IHS+Markit, ComponentLink4URL=https://datasheet.ciiva.com:443/pdfs/VipMasterIC/IC/ONSM/ONSM-S-A0006325923/ONSM-S-A0006325923-1.pdf?src-supplier=IHS+Markit, ComponentLink5Description=https://datasheet.ciiva.com/27748/1311839-27748800.pdf?src-supplier=Jameco, ComponentLink5URL=https://datasheet.ciiva.com/27748/1311839-27748800.pdf?src-supplier=Jameco, ComponentLink6Description=https://datasheet.ciiva.com/22637/esd5z2-5t1-d-22637184.pdf?src-supplier=Element14, ComponentLink6URL=https://datasheet.ciiva.com/22637/esd5z2-5t1-d-22637184.pdf?src-supplier=Element14, ComponentLink7Description=https://datasheet.ciiva.com/15143/getdatasheetpartid-147990-15143766.pdf?src-supplier=Verical, ComponentLink7URL=https://datasheet.ciiva.com/15143/getdatasheetpartid-147990-15143766.pdf?src-supplier=Verical, ComponentLink8Description=https://datasheet.ciiva.com/30479/0900766b8125092b-30479039.pdf?src-supplier=Rs, ComponentLink8URL=https://datasheet.ciiva.com/30479/0900766b8125092b-30479039.pdf?src-supplier=Rs, ComponentLink9Description=https://datasheet.ciiva.com/22637/1878252-22637182.pdf?src-supplier=Element14, ComponentLink9URL=https://datasheet.ciiva.com/22637/1878252-22637182.pdf?src-supplier=Element14, ComponentLink10Description=https://datasheet.ciiva.com/8084/esd5z2-5t1-d-8084057.pdf?src-supplier=Avnet, ComponentLink10URL=https://datasheet.ciiva.com/8084/esd5z2-5t1-d-8084057.pdf?src-supplier=Avnet, ComponentLink11Description=https://datasheet.ciiva.com/16385/esd5z2-5t1-d-16385093.pdf?src-supplier=Future+Electronics, ComponentLink11URL=https://datasheet.ciiva.com/16385/esd5z2-5t1-d-16385093.pdf?src-supplier=Future+Electronics, ComponentLink12Description=https://datasheet.ciiva.com/339/esd5z2-5t1-d-339749.pdf?src-supplier=Digikey, ComponentLink12URL=https://datasheet.ciiva.com/339/esd5z2-5t1-d-339749.pdf?src-supplier=Digikey, ComponentLink13Description=https://datasheet.ciiva.com/339/esd5z2-5t1-d-339750.pdf?src-supplier=Digikey, ComponentLink13URL=https://datasheet.ciiva.com/339/esd5z2-5t1-d-339750.pdf?src-supplier=Digikey, ComponentLink14Description=https://datasheet.ciiva.com/339/esd5z2-5t1-d-339748.pdf?src-supplier=Digikey, ComponentLink14URL=https://datasheet.ciiva.com/339/esd5z2-5t1-d-339748.pdf?src-supplier=Digikey, DatasheetVersion="Rev. 10", Diode Element Material=SILICON, Diode Type="TRANS VOLTAGE SUPPRESSOR", Direction=Unidirectional, IR Max (uA)=0.05, JESD-30 Code=R-PDSO-F2, JESD-609 Code=e3, Manufacturer Part Number=ESD5Z5.0T1G, Moisture Sensitivity Level=1, Mounting Technology="Surface Mount", Number of Elements=1, Number of Lines=1, PackageDescription="2-Pin SOD, Body 1.2 x 0.8 mm", PackageReference=SOD-523-2-502-01, PackageVersion="Rev. E, 09/2010", Packing="Tape and Reel", PartNumber=ESD5Z5.0T1G, Pins=2, Polarity=Unidirectional, PPK Max (W)=174, Pricing="1=0.24, 10=0.162, 100=0.0791, 500=0.06598, 1000=0.04584 (USD)", Qualification Status="Not Qualified", Reach SVHC Compliant=Yes, Reference Standard=IEC-61000-4-2, RoHS=Pb-Free, RoHS Compliant=Yes, Stock=420044, Supplier=Digikey, Surface Mount=Yes, Technology=AVALANCHE, Terminal Finish=Tin, Terminal Form=Flat, Terminal Position=DUAL, V(BR) Min (V)=6.2, VRWM Max (V)=5
J1: library part CMP-1502-00188-2, Color=Black, Current Rating=5A, Flammability Rating="UL94 V-0", Insulation Resistance=100MΩ, Manufacturer="Wurth Electronics", Max Operating Temperature=85°C, Min Operating Temperature=-40°C, Operating Supply Voltage=24V, Supplier Part Number=732-5930-ND, Voltage Rating (DC)=20V, Category="Power Connectors", ComponentLink1Description=https://datasheet.ciiva.com:443/pdfs/VipMasterIC/IC/MIDC/MIDC-S-A0001192814/MIDC-S-A0001192814-1.pdf?src-supplier=IHS+Markit, ComponentLink1URL=https://datasheet.ciiva.com:443/pdfs/VipMasterIC/IC/MIDC/MIDC-S-A0001192814/MIDC-S-A0001192814-1.pdf?src-supplier=IHS+Markit, ComponentLink2Description=http://www.mouser.com/ds/2/445/6941xx301002-469315.pdf?src-supplier=Mouser, ComponentLink2URL=http://www.mouser.com/ds/2/445/6941xx301002-469315.pdf?src-supplier=Mouser, ComponentLink3Description=http://www.farnell.com/cad/2130967.pdf?src-supplier=Element14, ComponentLink3URL=http://www.farnell.com/cad/2130967.pdf?src-supplier=Element14, ComponentLink4Description=https://katalog.we-online.de/em/datasheet/6941xx301002.pdf?src-supplier=Digikey, ComponentLink4URL=https://katalog.we-online.de/em/datasheet/6941xx301002.pdf?src-supplier=Digikey, Connector Type=Power, Contact Finish - Mating="NOT SPECIFIED", Contact Gender=Female, Contact Material="Gold, Tin", Contact Plating=Tin, Gender=Male, Height=11mm, Housing Material=Polyamide, Manufacturer Part Number=694106301002, Mount="Through Hole", NexarPartId=52676100, Number of Contacts=3, Packaging=Bulk, Pricing="1=1.02, 10=0.97, 50=0.86, 100=0.8, 500=0.69, 1000=0.59 (USD)", REACH SVHC=Unknown, Reach SVHC Compliant=Yes, RoHS=Compliant, RoHS Compliant=Yes, Shielding=Unshielded, Stock=12798, Supplier=Digikey, Termination="Through Hole", Voltage Rating=24V
J2: library part CMP-2000-05610-1, "Right Angle Female Type AB Micro USB Connector, 30 V, 1.8 A, -30 to 85 degC, RoHS, Tape and Reel", Color=Black, Current Rating=1.8A, Manufacturer=Molex, Operating Temperature Range=-20Cto+85C, Package Description="Micro USB Connector, Pitch 0.65 mm, 5 Positions, Body 7.5 x 5.6 mm", Voltage Rating=30VAC, Brand=Molex, Connector Type=MicroUSBTypeABreceptacle, Contact Material=CopperAlloy, Contact Plating=Gold, Datasheet URL=http://www.molex.com/webdocs/datasheets/pdf/en-us/0475890001_IO_CONNECTORS.pdf, Datasheet Version=12/2016, Gender=Female, Manufacturer URL=http://www.molex.com/, Mounting Angle=Right, Mounting Technology=SurfaceMount, Number of Contacts=5Contact, Number of Ports=1Port, Package Reference=47589-0001, Package URL=http://www.molex.com/pdm_docs/sd/475890001_sd.pdf, Packaging=Reel, Product=MicroUSBTypeABConnectors, Product Category=USBConnectors, RoHS=True, Series=47589, Standard=USB, Termination Style=SMD/SMT
J3: library part CMP-1502-03254-2, Color=Blue, Current=10A, Max Operating Temperature=105°C, Min Operating Temperature=-40°C, Voltage=125V, Contact Material="Brass, Copper, Nickel, Tin, Zinc", Contact Plating=Tin, Current Rating=10A, Height=8.5mm, Housing Material=Nylon, Lead Pitch=3.5mm, Length=7mm, Mount="Through Hole", NexarPartId=18818286, Number of Contacts=2, Number of Levels=1, Number of Pins=2, Number of Positions Per Level=2, Number of Rows=1, Packaging=Box, Pitch=3.5052mm, Plating=Steel, REACH SVHC=Unknown, RoHS=Compliant, Stripping Length=-6mm, Termination=Screw, Voltage Rating=125V, Width=8mm, Wire Gauge (Max)=26AWG, Wire Gauge (Min)=16AWG, Wire/Cable Gauge=26AWG
MD1: library part CMP-194065-000026-1, "RX TXRX MOD WIFI TRACE ANT SMD"
Q1 Q2: library part CMP-1048-00772-1, "General Purpose Transistor, NPN Silicon, 3-Pin SOT-23, Pb-Free, Tape and Reel", Collector-emitter Voltage-Max=25V, DC Current Gain-Min (hFE)=40, Frequency=100MHz, Manufacturer="On Semiconductor", Max Collector Current=500mA, Max Operating Temperature=150°C, Package Body Material=Plastic, Package Shape=Rectangular, Package Style="SMALL OUTLINEMeter", Peak Reflow Temperature (Cel)=260°C, Power Dissipation-Max (Abs)=330mW, Supplier Part Number=BC818-40LT1GOSCT-ND, Time @ Peak Reflow Temperature-Max (s)=40s, Category=BJTs, ComponentLink1Description="Manufacturer URL", ComponentLink1URL=http://www.onsemi.com/, ComponentLink2Description=Datasheet, ComponentLink2URL=http://www.onsemi.com/pub_link/Collateral/BC818-40LT-D.PDF, ComponentLink3Description="Package Specification", ComponentLink3URL=http://www.onsemi.cn/pub_link/Collateral/318-08.PDF, ComponentLink4Description=https://datasheet.ciiva.com:443/pdfs/VipMasterIC/IC/ONSM/ONSMS37803/ONSMS37803-1.pdf?src-supplier=IHS+Markit, ComponentLink4URL=https://datasheet.ciiva.com:443/pdfs/VipMasterIC/IC/ONSM/ONSMS37803/ONSMS37803-1.pdf?src-supplier=IHS+Markit, ComponentLink5Description=https://datasheet.ciiva.com/4722/bc818-40lt1-d-4722421.pdf?src-supplier=Mouser, ComponentLink5URL=https://datasheet.ciiva.com/4722/bc818-40lt1-d-4722421.pdf?src-supplier=Mouser, ComponentLink6Description=https://datasheet.ciiva.com/16418/bc818-40lt1-d-16418519.pdf?src-supplier=Future+Electronics, ComponentLink6URL=https://datasheet.ciiva.com/16418/bc818-40lt1-d-16418519.pdf?src-supplier=Future+Electronics, ComponentLink7Description=https://datasheet.ciiva.com/980/bc818-40lt1-d-980725.pdf?src-supplier=Digikey, ComponentLink7URL=https://datasheet.ciiva.com/980/bc818-40lt1-d-980725.pdf?src-supplier=Digikey, ComponentLink8Description=https://datasheet.ciiva.com/980/bc818-40lt1-d-980726.pdf?src-supplier=Digikey, ComponentLink8URL=https://datasheet.ciiva.com/980/bc818-40lt1-d-980726.pdf?src-supplier=Digikey, ComponentLink9Description=https://datasheet.ciiva.com/980/bc818-40lt1-d-980724.pdf?src-supplier=Digikey, ComponentLink9URL=https://datasheet.ciiva.com/980/bc818-40lt1-d-980724.pdf?src-supplier=Digikey, DatasheetVersion="Rev. 3", fT Min (MHz)=100, IC Continuous (A)=0.5, JEDEC-95 Code=TO-236AB, JESD-30 Code=R-PDSO-G3, JESD-609 Code=e3, Manufacturer Part Number=BC818-40LT1G, Moisture Sensitivity Level=1, Mounting Technology="Surface Mount", Number of Elements=1, PackageDescription="3-Pin Small Outline Transistor, Body 2.92 x 1.3 mm, Pitch 0.95 mm", PackageReference=SOT-23-3-318-08, PackageVersion="Rev. AP, 11/2009", Packing="Tape and Reel", PartNumber=BC818-40LT1G, Pins=3, Polarity=NPN, Polarity/Channel Type=NPN, Pricing="1=0.16, 10=0.116, 100=0.0628, 500=0.0493, 1000=0.03424 (USD)", Qualification Status="Not Qualified", Reach SVHC Compliant=Yes, RoHS=TRUE, RoHS Compliant=Yes, Stock=14183, Supplier=Digikey, Surface Mount=Yes, Terminal Finish=Tin, Terminal Form="Gull Wing", Terminal Position=DUAL, Transistor Element Material=SILICON
R1 R16 R22 R23 R25: library part CMP-1659-00013-4, "Chip Resistor, 10 KOhm, +/- 1%, 0.125 W, -55 to 155 degC, 0805 (2012 Metric), RoHS, Tape and Reel", Case/Package=0805, Manufacturer=Yageo, Max Operating Temperature="155 degC", Min Operating Temperature="-55 degC", Package Height=0.5mm, Package Length=2mm, Package Quantity=5000, Package Shape=Rectangular, Package Style=SMTMeter, Package Width=1.25mm, Power=125mW, Rated Temperature=70°C, Resistor Type="FIXED RESISTOR", Supplier Part Number=311-10.0KCRCT-ND, Temperature Coefficient=100ppm/°C, Tolerance=1%, Voltage Rating="150 V", Working Voltage=150V, Additional Feature="LASER TRIMMABLE", Category="Chip SMD Resistors", ComponentLink1Description="Manufacturer URL", ComponentLink1URL=http://www.yageo.com/, ComponentLink2Description=Datasheet, ComponentLink2URL=http://www.yageo.com/documents/recent/PYu-RC_Group_51_RoHS_L_04.pdf, ComponentLink3Description=https://datasheet.ciiva.com:443/pdfs/VipMasterIC/IC/YAGO/YAGO-S-A0008145938/YAGO-S-A0008145938-1.pdf?src-supplier=IHS+Markit, ComponentLink3URL=https://datasheet.ciiva.com:443/pdfs/VipMasterIC/IC/YAGO/YAGO-S-A0008145938/YAGO-S-A0008145938-1.pdf?src-supplier=IHS+Markit, ComponentLink4Description=https://datasheet.ciiva.com/11808/0900766b8106beab-11808151.pdf?src-supplier=Rs, ComponentLink4URL=https://datasheet.ciiva.com/11808/0900766b8106beab-11808151.pdf?src-supplier=Rs, ComponentLink5Description=https://datasheet.ciiva.com/46447/444164-46447563.pdf?src-supplier=Element14, ComponentLink5URL=https://datasheet.ciiva.com/46447/444164-46447563.pdf?src-supplier=Element14, ComponentLink6Description=https://datasheet.ciiva.com/2456/pyu-r-int-thick-7-2456973.pdf?src-supplier=Digikey, ComponentLink6URL=https://datasheet.ciiva.com/2456/pyu-r-int-thick-7-2456973.pdf?src-supplier=Digikey, ComponentLink7Description=https://datasheet.ciiva.com/2456/pyu-r-int-thick-7-2456974.pdf?src-supplier=Digikey, ComponentLink7URL=https://datasheet.ciiva.com/2456/pyu-r-int-thick-7-2456974.pdf?src-supplier=Digikey, ComponentLink8Description=https://datasheet.ciiva.com/2456/pyu-r-int-thick-7-2456972.pdf?src-supplier=Digikey, ComponentLink8URL=https://datasheet.ciiva.com/2456/pyu-r-int-thick-7-2456972.pdf?src-supplier=Digikey, ComponentLink9Description=https://datasheet.ciiva.com/12669/rc0805-12669688.pdf?src-supplier=Mouser, ComponentLink9URL=https://datasheet.ciiva.com/12669/rc0805-12669688.pdf?src-supplier=Mouser, ComponentLink10Description=https://datasheet.ciiva.com/16747/rc0805-16747087.pdf?src-supplier=Future+Electronics, ComponentLink10URL=https://datasheet.ciiva.com/16747/rc0805-16747087.pdf?src-supplier=Future+Electronics, Construction=Chip, DatasheetVersion="Rev. 4, 02/2016", Height="0.5 mm", JESD-609 Code=e3, Length="2 mm", Manufacturer Part Number=RC0805FR-0710KL, Mount="Surface Mount", Mounting Technology="Surface Mount", PackageDescription="2-Pin Surface Mounted Device, Body 2 x 1.25 mm", PackageReference=0805, Packaging="Tape and Reel", Pins=2, Pricing="1=0.1, 10=0.027, 50=0.017, 100=0.0142, 500=0.00976, 1000=0.00844 (USD)", REACH SVHC="No SVHC", Reach SVHC Compliant=Yes, RoHS=Yes, RoHS Compliant=Yes, RoHSCompliant=true, Stock=4430741, Supplier=Digikey, Technology="METAL GLAZE/THICK FILM", Terminal Finish=Nickel, Termination=Wraparound
R20 R21: library part CMP-2001-03823-2, "RES Thick Film, 330Ω, 1%, 0.125W, 100ppm/°C, 0805", Case Code (Imperial)=0805, Case Code (Metric)=2012, Manufacturer=Vishay, Max Operating Temperature=155°C, Max Power Dissipation=125mW, Min Operating Temperature=-55°C, Package Height=0.45mm, Package Length=2mm, Package Quantity=10, Package Shape=Rectangular, Package Style=SMTMeter, Package Width=1.25mm, Rated Temperature=70°C, Resistance=330R, Resistor Type="FIXED RESISTOR", Supplier Part Number=541-330CCT-ND, Temperature Coefficient=100ppm/°C, Tolerance=1%, Voltage Rating=150V, Case/Package=0805, Category="Chip SMD Resistors", ComponentLink1Description=https://datasheet.ciiva.com:443/pdfs/VipMasterIC/IC/VISH/VISH-S-A0007266705/VISH-S-A0007266705-1.pdf?src-supplier=IHS+Markit, ComponentLink1URL=https://datasheet.ciiva.com:443/pdfs/VipMasterIC/IC/VISH/VISH-S-A0007266705/VISH-S-A0007266705-1.pdf?src-supplier=IHS+Markit, Composition="Thick Film", Construction=Chip, Contact Plating=Tin, Depth=1.25mm, Features="Automotive AEC-Q200", Height=0.02inch, JESD-609 Code=e3, Lead Free="Lead Free", Length=2mm, Manufacturer Part Number=CRCW0805330RFKEA, Military Standard=Not, Mount="Surface Mount", Mounting Technology="Surface Mount", Number of Terminations=2, Packaging="Tape and Reel", Pins=2, Power=125mW, Power Rating=125mW, Pricing="1=0.1, 10=0.038, 50=0.0248, 100=0.021, 500=0.01462, 1000=0.01273 (USD)", Reach SVHC Compliant=Yes, Reference Standard=AEC-Q200, RoHS=Yes, RoHS Compliant=Yes, Stock=41783, Supplier=Digikey, Technology="METAL GLAZE/THICK FILM", Terminal Finish=Nickel, Termination=SMD/SMT, Voltage Rating (DC)=150V, Weight=0.000194oz, Width=0.049inch, Working Voltage=150V